# EAGLE board board layout (EAGLE 9.6.2), part 1 of 2
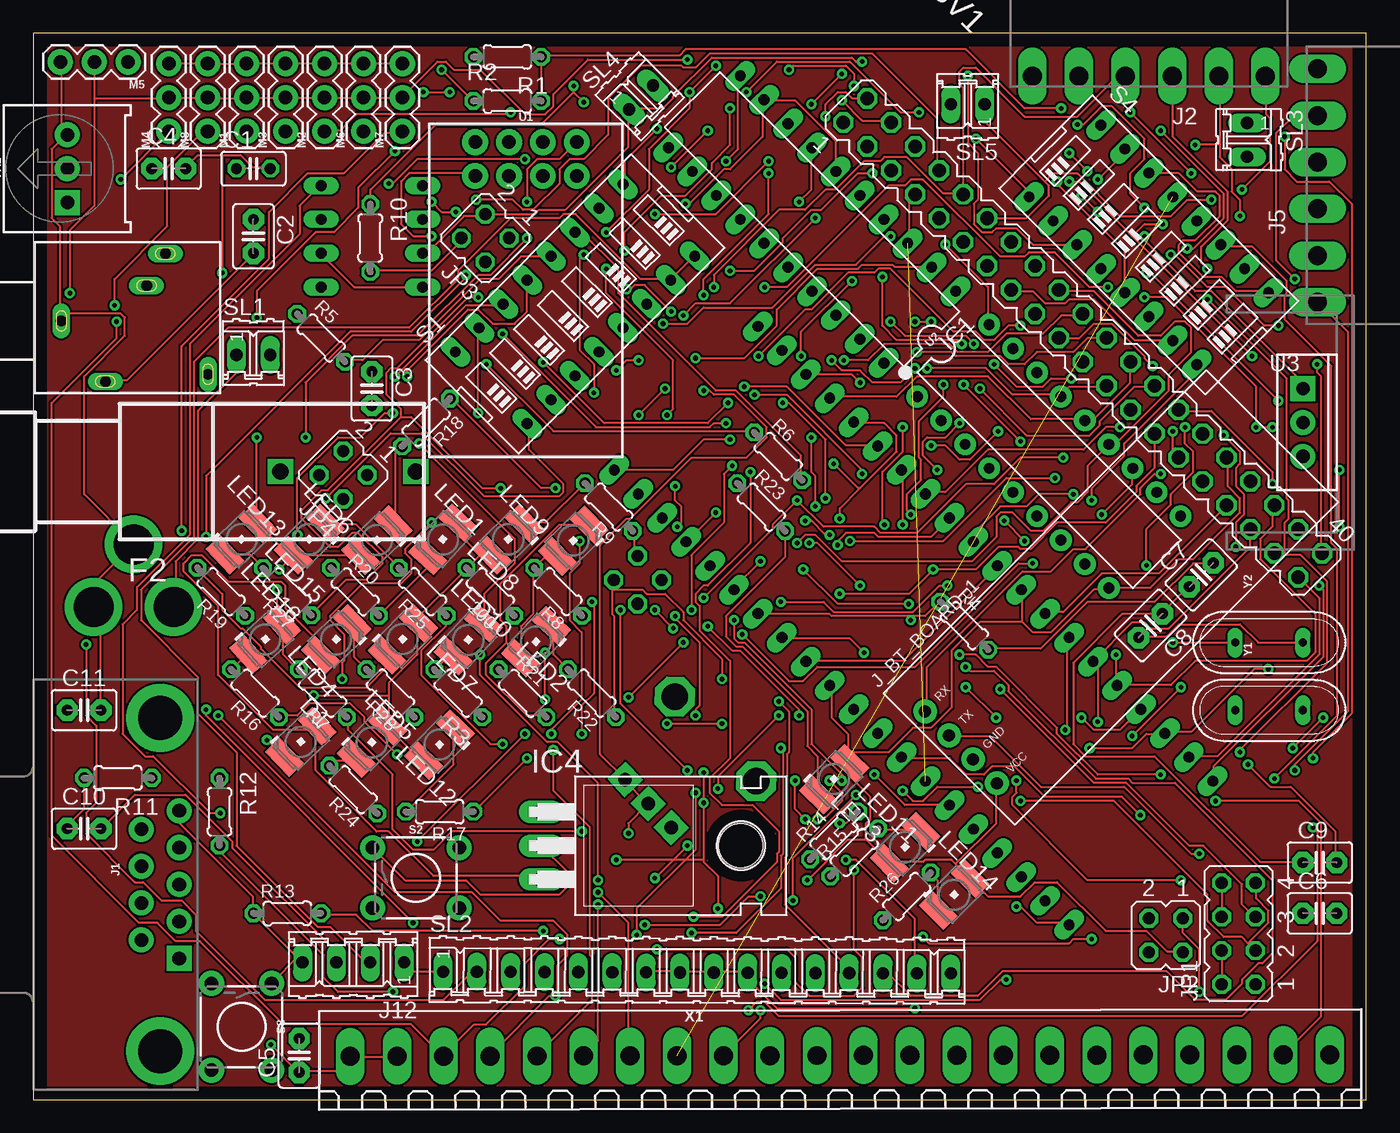
[diagram p0: board, top side]
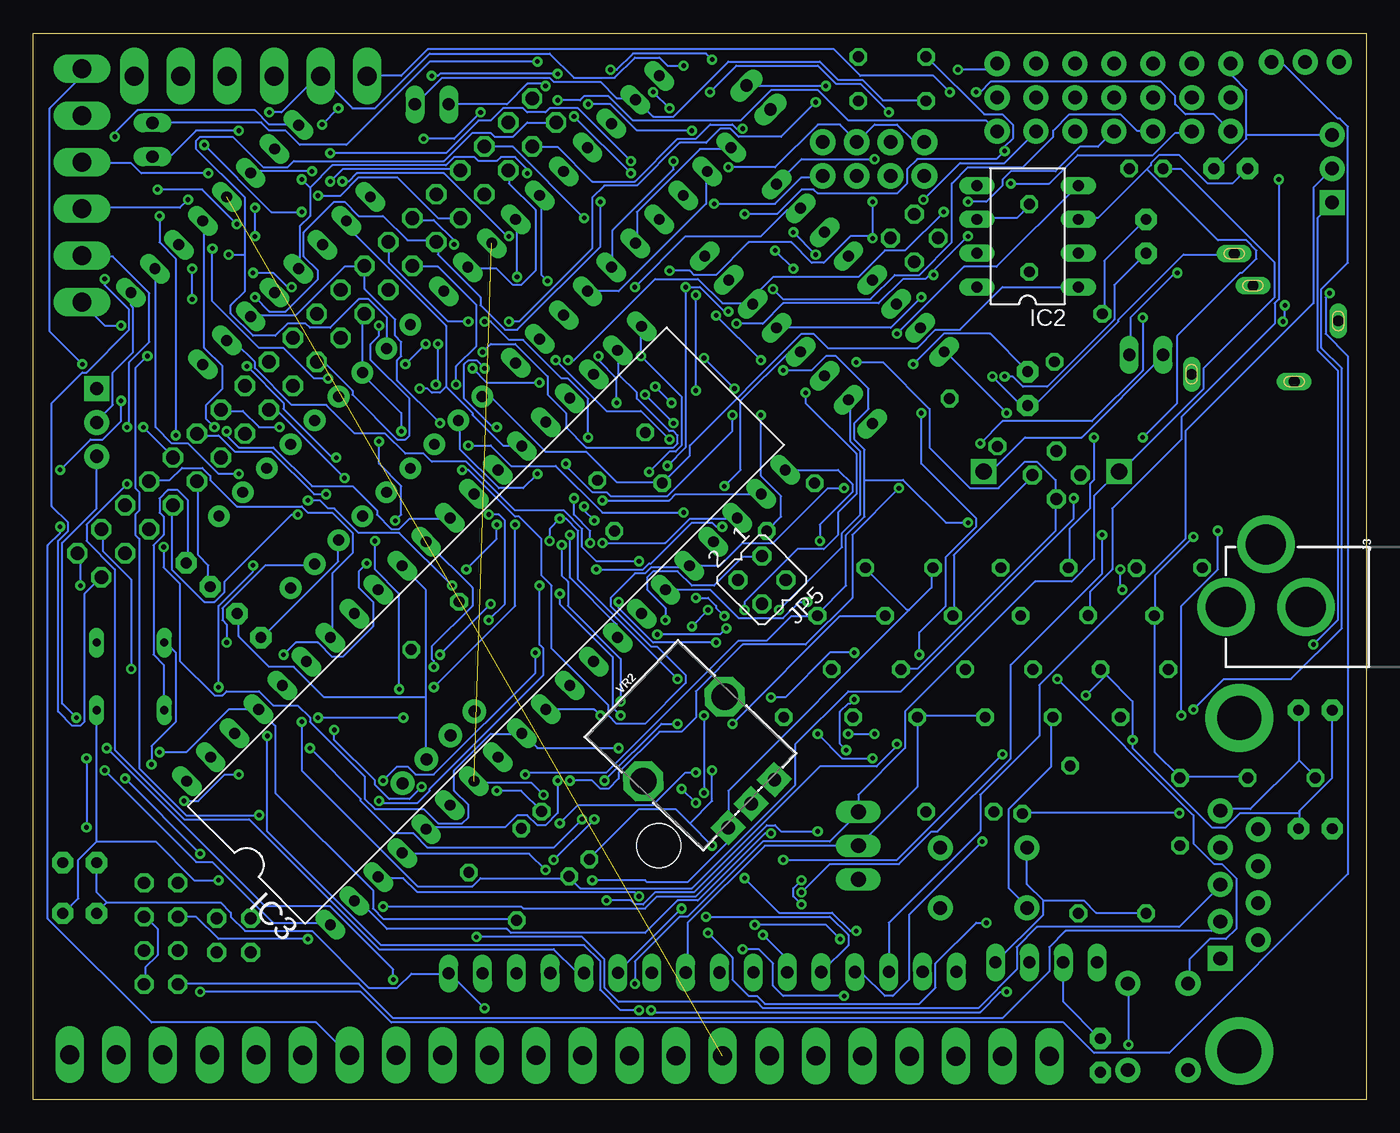
[diagram p1: board, bottom side, seen from below]

Size 100 x 80 mm. Coordinates in mm from the lower left corner, seen from the top.
Outline: 0,0 100,0 100,80 0,80 0,0
Copper layers (1*16): Top 0.035mm / dielectric 1.5mm / Bottom 0.035mm
Design rules "default": minimum track width 6mil, minimum drill 0.35mm, track to track 6mil, track to pad 6mil, pad to pad 6mil, via to via 6mil, smd to smd 6mil, copper to edge 40mil, drill to drill 6mil, minimum pad ring 10mil, minimum via ring 8mil, stop-mask expansion 4mil, vias tented up to drill 0mil, thermal gap 10mil

## Footprints (pad centres in the part's own frame; a part is rotated, then mirrored left to right if it is on the bottom)
0204/5 = drill 0.813 octagon: 1 -2.54,0; 2 2.54,0
C025-025X050 = drill 0.813 octagon: 1 -1.27,0; 2 1.27,0
C2.5-3 = drill 0.813 pad 1.6 octagon: 1 -1.27,0; 2 1.27,0
PLCC2 = smd 2.6 x 1.5: A 0,1.7; C 0,-1.7
FUSE_HOLDER_MENTOR-1821 = drill 1.219 pad 1.905 square: A 10.16,0; B 0,0
DIL20 = drill 0.813 long: 1 -11.43,-3.81; 2 -8.89,-3.81; 3 -6.35,-3.81; 4 -3.81,-3.81; 5 -1.27,-3.81; 6 1.27,-3.81; 7 3.81,-3.81; 8 6.35,-3.81; 9 8.89,-3.81; 10 11.43,-3.81; 11 11.43,3.81; 12 8.89,3.81; 13 6.35,3.81; 14 3.81,3.81; 15 1.27,3.81; 16 -1.27,3.81; 17 -3.81,3.81; 18 -6.35,3.81; 19 -8.89,3.81; 20 -11.43,3.81
DIL08 = drill 0.813 long: 1 -3.81,-3.81; 2 -1.27,-3.81; 3 1.27,-3.81; 4 3.81,-3.81; 5 3.81,3.81; 6 1.27,3.81; 7 -1.27,3.81; 8 -3.81,3.81
DIL40 = drill 0.813 long: 1 -24.13,-7.62; 2 -21.59,-7.62; 3 -19.05,-7.62; 4 -16.51,-7.62; 5 -13.97,-7.62; 6 -11.43,-7.62; 7 -8.89,-7.62; 8 -6.35,-7.62; 9 -3.81,-7.62; 10 -1.27,-7.62; 11 1.27,-7.62; 12 3.81,-7.62; 13 6.35,-7.62; 14 8.89,-7.62; 15 11.43,-7.62; 16 13.97,-7.62; 17 16.51,-7.62; 18 19.05,-7.62; 19 21.59,-7.62; 20 24.13,-7.62; 21 24.13,7.62; 22 21.59,7.62; 23 19.05,7.62; 24 16.51,7.62; 25 13.97,7.62; 26 11.43,7.62; 27 8.89,7.62; 28 6.35,7.62; 29 3.81,7.62; 30 1.27,7.62; 31 -1.27,7.62; 32 -3.81,7.62; 33 -6.35,7.62; 34 -8.89,7.62; 35 -11.43,7.62; 36 -13.97,7.62; 37 -16.51,7.62; 38 -19.05,7.62; 39 -21.59,7.62; 40 -24.13,7.62
TO220H = drill 1.118 long: 1 -2.54,-10.16; 2 0,-10.16; 3 2.54,-10.16 | hole 3.302: 0,4.826
DB9 = drill 1.016 pad 1.88 square: 1 -5.54,-1.42 | drill 1.016 pad 1.88: 2 -2.77,-1.42; 3 0,-1.42; 4 2.77,-1.42; 5 5.54,-1.42; 6 -4.15,1.42; 7 -1.38,1.42; 8 1.38,1.42; 9 4.15,1.42 | drill 3.302 pad 5.08: G1 -12.5,0; G2 12.5,0
1X06_SCREW_TERMINAL_BLOCK = drill 1.422 long: 1 -8.75,5.25; 2 -5.25,5.25; 3 -1.75,5.25; 4 1.75,5.25; 5 5.25,5.25; 6 8.75,5.25
POWER_JACK_PTH = drill 2.997 pad 4.318: GND 0,7.7; GNDBREAK 4.7,10.7; PWR 0,13.7
04P = drill 0.914 long: 1 -3.81,0; 2 -1.27,0; 3 1.27,0; 4 3.81,0
BT_BOARD_FOOTPRINT = drill 0.9 pad 1.778: GND -16.51,-1.27; RX -16.51,3.81; TX -16.51,1.27; VCC -16.51,-3.81
JP4Q = drill 0.914 octagon: 1 -3.81,-1.27; 2 -3.81,1.27; 3 -1.27,-1.27; 4 -1.27,1.27; 5 1.27,-1.27; 6 1.27,1.27; 7 3.81,-1.27; 8 3.81,1.27
JP2Q = drill 0.914 octagon: 1 -1.27,-1.27; 2 -1.27,1.27; 3 1.27,-1.27; 4 1.27,1.27
1X03 = drill 1.016 pad 1.88: 1 0,0; 2 2.54,0; 3 5.08,0
EDG-08 = drill 0.813 long: 1 -8.89,-3.81; 2 -6.35,-3.81; 3 -3.81,-3.81; 4 -1.27,-3.81; 5 1.27,-3.81; 6 3.81,-3.81; 7 6.35,-3.81; 8 8.89,-3.81; 9 8.89,3.81; 10 6.35,3.81; 11 3.81,3.81; 12 1.27,3.81; 13 -1.27,3.81; 14 -3.81,3.81; 15 -6.35,3.81; 16 -8.89,3.81
TACTILE_SWITCH_PTH_6.0MM = drill 1.016 pad 1.88: 1 -3.251,2.261; 2 3.251,2.261; 3 -3.251,-2.261; 4 3.251,-2.261
02P = drill 0.914 long: 1 -1.27,0; 2 1.27,0
16P = drill 0.914 long: 1 -19.05,0; 2 -16.51,0; 3 -13.97,0; 4 -11.43,0; 5 -8.89,0; 6 -6.35,0; 7 -3.81,0; 8 -1.27,0; 9 1.27,0; 10 3.81,0; 11 6.35,0; 12 8.89,0; 13 11.43,0; 14 13.97,0; 15 16.51,0; 16 19.05,0
MA20-2 = drill 1.016 octagon: 1 -24.13,-1.27; 2 -24.13,1.27; 3 -21.59,-1.27; 4 -21.59,1.27; 5 -19.05,-1.27; 6 -19.05,1.27; 7 -16.51,-1.27; 8 -16.51,1.27; 9 -13.97,-1.27; 10 -13.97,1.27; 11 -11.43,-1.27; 12 -11.43,1.27; 13 -8.89,-1.27; 14 -8.89,1.27; 15 -6.35,-1.27; 16 -6.35,1.27; 17 -3.81,-1.27; 18 -3.81,1.27; 19 -1.27,-1.27; 20 -1.27,1.27; 21 1.27,-1.27; 22 1.27,1.27; 23 3.81,-1.27; 24 3.81,1.27; 25 6.35,-1.27; 26 6.35,1.27; 27 8.89,-1.27; 28 8.89,1.27; 29 11.43,-1.27; 30 11.43,1.27; 31 13.97,-1.27; 32 13.97,1.27; 33 16.51,-1.27; 34 16.51,1.27; 35 19.05,-1.27; 36 19.05,1.27; 37 21.59,-1.27; 38 21.59,1.27; 39 24.13,-1.27; 40 24.13,1.27
ESP8266_ESP-01 = drill 1.016 pad 1.93: 1 -3.81,-11.13; 2 -1.27,-11.13; 3 1.27,-11.13; 4 3.81,-11.13; 5 3.81,-8.59; 6 1.27,-8.59; 7 -1.27,-8.59; 8 -3.81,-8.59
DIP18 = drill 0.813 pad 1.626: 1 -10.16,-3.81; 2 -7.62,-3.81; 3 -5.08,-3.81; 4 -2.54,-3.81; 5 0,-3.81; 6 2.54,-3.81; 7 5.08,-3.81; 8 7.62,-3.81; 9 10.16,-3.81; 10 10.16,3.81; 11 7.62,3.81; 12 5.08,3.81; 13 2.54,3.81; 14 0,3.81; 15 -2.54,3.81; 16 -5.08,3.81; 17 -7.62,3.81; 18 -10.16,3.81
TO220-ADJ = drill 1 pad 1.88 square: ADJ -2.54,0 | drill 1 pad 1.88: IN 2.54,0; OUT 0,0
TRIMPOT-PTH-3386U = drill 1.016 pad 1.88 square: 1 -2.54,-0.015 | drill 1.016 pad 1.88: 2 0,-0.015; 3 2.54,-0.015
POT-PTH-ALPS = drill 1 pad 1.88 square: P$1 7,-2.5; P$2 7,0; P$3 7,2.5 | drill 2 octagon: P$4 0,-4.4; P$5 0,4.4
180G-22 = drill 1.422 long: 1 -36.75,0; 2 -33.25,0; 3 -29.75,0; 4 -26.25,0; 5 -22.75,0; 6 -19.25,0; 7 -15.75,0; 8 -12.25,0; 9 -8.75,0; 10 -5.25,0; 11 -1.75,0; 12 1.75,0; 13 5.25,0; 14 8.75,0; 15 12.25,0; 16 15.75,0; 17 19.25,0; 18 22.75,0; 19 26.25,0; 20 29.75,0; 21 33.25,0; 22 36.75,0
1503_09 = drill 0.8 pad 1.2 long: 1 0,-2.1; 2 -4.55,-5.4; 3 5.05,-9.9; 4 -4,-13.1; 5 2.65,-8.5
QS = drill 0.61 long: 1 -2.54,0; 2 2.54,0

## Placement (x,y rotation side)
200  [0204/5]  34.29,38.1 135 top
C1  47uF  [C025-025X050]  16.51,69.85 0 top
C2  10uF  [C2.5-3]  16.51,64.77 270 top
C3  10uF  [C2.5-3]  25.4,53.34 270 top
C4  1uF  [C2.5-3]  10.16,69.85 0 top
C5  1uF  [C2.5-3]  19.94,3.3 90 top
C6  15uF  [C2.5-3]  96.52,13.97 0 top
C7  15uF  [C2.5-3]  87.63,39.37 45 top
C8  15uF  [C2.5-3]  83.82,35.56 225 top
C9  15uF  [C2.5-3]  96.52,17.78 0 top
C10  1uF  [C2.5-3]  3.81,20.32 0 top
C11  1uF  [C2.5-3]  3.81,29.21 0 top
D1  LG_T679-E1F1-1  [PLCC2]  20.07,26.84 313.5 top
F2  FUSE1821  [FUSE_HOLDER_MENTOR-1821]  18.54,47.12 0 top
IC1  MAX233  [DIL20]  58.42,66.04 135 top
IC2  PCA82C250  [DIL08]  25.4,64.77 90 bottom
IC3  PIC16F877P  [DIL40]  66.04,35.56 45 bottom
IC4  7805T  [TO220H]  48.26,19.05 270 top
J1  [DB9]  9.53,16.13 90 top
J2  [1X06_SCREW_TERMINAL_BLOCK]  83.69,82.04 180 top
J3  POWER_JACK  [POWER_JACK_PTH]  -3.17,36.96 90 bottom
J5  [1X06_SCREW_TERMINAL_BLOCK]  101.6,68.58 90 top
J12  [04P]  24,10.29 180 top
J_BT_BOARD_1  BLUETOOTH_BOARD  [BT_BOARD_FOOTPRINT]  81.28,38.1 45 top
JP1  [JP4Q]  90.42,12.45 90 top
JP2  [JP2Q]  84.96,12.32 180 top
JP3  [JP2Q]  33.91,64.64 135 top
JP4  [JP2Q]  23.24,46.86 135 top
JP5  [JP2Q]  45.34,38.99 225 bottom
LED1  LG_T679-E1F1-1  [PLCC2]  35.64,42.04 134.6 top
LED2  LG_T679-E1F1-1  [PLCC2]  32.64,34.49 317.1 top
LED3  LG_T679-E1F1-1  [PLCC2]  65.41,18.94 134.9 top
LED4  LG_T679-E1F1-1  [PLCC2]  17.4,34.53 311.8 top
LED5  LG_T679-E1F1-1  [PLCC2]  30.48,26.63 135.4 top
LED6  LG_T679-E1F1-1  [PLCC2]  25.78,41.97 133.3 top
LED7  LG_T679-E1F1-1  [PLCC2]  27.71,34.54 315.5 top
LED8  LG_T679-E1F1-1  [PLCC2]  30.73,42.03 317.7 top
LED9  LG_T679-E1F1-1  [PLCC2]  40.51,41.94 134.4 top
LED10  LG_T679-E1F1-1  [PLCC2]  37.72,34.36 136.5 top
LED11  LG_T679-E1F1-1  [PLCC2]  60.07,24.04 315.5 top
LED12  LG_T679-E1F1-1  [PLCC2]  25.4,26.81 315.9 top
LED13  LG_T679-E1F1-1  [PLCC2]  15.62,42.04 313.3 top
LED14  LG_T679-E1F1-1  [PLCC2]  69.09,15.37 315 top
LED15  LG_T679-E1F1-1  [PLCC2]  20.7,42.04 134.9 top
LED16  LG_T679-E1F1-1  [PLCC2]  22.73,34.52 134.6 top
M1  SERVO  [1X03]  16,72.64 90 top
M2  SERVO  [1X03]  21.84,72.64 90 top
M3  SERVO  [1X03]  18.92,72.64 90 top
M4  SERVO  [1X03]  10.16,72.64 90 top
M5  SERVO  [1X03]  7.11,77.85 180 top
M6  SERVO  [1X03]  24.77,72.64 90 top
M7  SERVO  [1X03]  27.69,72.64 90 top
M8  SERVO  [1X03]  13.08,72.64 90 top
R1  220  [0204/5]  35.56,78.23 180 top
R2  360  [0204/5]  35.56,74.93 0 top
R3  470  [0204/5]  31.88,30.48 135 top
R4  330  [0204/5]  69.85,35.56 315 top
R5  1k  [0204/5]  21.59,57.15 315 top
R6  1k  [0204/5]  55.88,48.26 315 top
R7  47k  [0204/5]  21.72,30.48 135 top
R8  4.7k  [0204/5]  39.37,38.1 135 top
R9  470  [0204/5]  43.18,44.45 135 top
R10  [0204/5]  25.27,64.64 270 top
R11  2000  [0204/5]  6.35,24.13 180 top
R12  1000  [0204/5]  13.97,21.59 270 top
R13  2000  [0204/5]  19.05,13.97 0 top
R14  1000  [0204/5]  60.07,19.81 45 top
R15  1000  [0204/5]  61.59,18.54 45 top
R16  1000  [0204/5]  16.64,30.48 135 top
R17  1000  [0204/5]  30.48,21.59 180 top
R18  1000  [0204/5]  29.46,50.8 225 top
R19  1000  [0204/5]  14.1,38.1 135 top
R20  1000  [0204/5]  24.13,38.1 315 top
R21  470  [0204/5]  36.7,30.48 315 top
R22  470  [0204/5]  41.91,30.48 135 top
R23  470  [0204/5]  54.61,44.45 315 top
R24  470  [0204/5]  24,23.24 135 top
R25  470  [0204/5]  29.21,38.1 135 top
R26  470  [0204/5]  65.53,15.24 45 top
R27  470  [0204/5]  19.05,38.1 135.6 top
R28  470  [0204/5]  26.8,30.48 135 top
S1  [EDG-08]  40.64,59.69 45 top
S2  MOMENTARY-SWITCH-SPST-PTH-6.0MM  [TACTILE_SWITCH_PTH_6.0MM]  28.7,16.64 0 top
S3  MOMENTARY-SWITCH-SPST-PTH-6.0MM  [TACTILE_SWITCH_PTH_6.0MM]  15.62,5.46 270 top
S4  [EDG-08]  83.69,64.14 315 top
SL1  [02P]  16.51,55.88 0 top
SL2  [16P]  49.78,9.53 359.8 top
SL3  [02P]  91.06,72.01 270 top
SL4  [02P]  45.59,75.18 45 top
SL5  [02P]  70.1,74.68 180 top
SV1  [MA20-2]  78.74,57.15 315 top
U1  ESP8266_ESP-01  [ESP8266_ESP-01]  36.96,60.71 180 top
U2  MCP2515  [DIP18]  76.2,48.26 315 top
U3  V_REG_317SINK  [TO220-ADJ]  95.25,50.8 270 top
VR1  10k  [TRIMPOT-PTH-3386U]  2.54,69.85 90 top
VR2  10k  [POT-PTH-ALPS]  51.18,27.05 316.2 bottom
X1  [180G-22]  60.53,3.3 0.1 top
X2  1503_09  [1503_09]  0,58.42 90 top
Y1  20M  [QS]  92.71,29.21 0 top
Y2  16M  [QS]  92.71,34.29 0 top

## Library data of the parts
200 R1-R28 = rcl; SPICEPREFIX: R
C1 = rcl; SPICEPREFIX: C
C2-C11 = capacitor-wima
D1 LED1-LED16 = led; COLOR: green
F2 = fuse; OC_FARNELL: unknown; OC_NEWARK: unknown
IC1 = maxim; MPN: MAX233ACPP+G36; OC_FARNELL: 1593332; OC_NEWARK: 89K3459
IC2 = micro-philips; OC_FARNELL: 3692358; OC_NEWARK: unknown
IC3 = microchip; MF: MICROCHIP; MPN: PIC16F877-04/P; OC_FARNELL: 9761349; OC_NEWARK: 61K3463
IC4 = linear
J1 = SparkFun-Connectors; PROD_ID: CONN-08194
J2 J5 = SparkFun-Connectors
J3 = SparkFun-Connectors; PROD_ID: CONN-08197
J12 SL1-SL5 = con-amp-quick; OC_FARNELL: unknown; OC_NEWARK: unknown
J_BT_BOARD_1 = bluetooth
JP1-JP5 = jumper
M1-M8 = SparkFun-Electromechanical
S1 S4 Y1 Y2 = special
S2 S3 = SparkFun-Switches; PROD_ID: SWCH-08441; SF_SKU: COM-00097
SV1 = con-lstb; OC_FARNELL: unknown; OC_NEWARK: unknown
U1 = SparkFun-RF; SF_ID: WRL-13678
U2 = SparkFun-IC-Comms; PROD_ID: NA-XXXXX
U3 = SparkFun-IC-Power
VR1 = SparkFun-Resistors; PROD_ID: RES-09730; SF_SKU: COM-09806
VR2 = SparkFun-Resistors; PROD_ID: RES-09177; SF_SKU: COM-09288
X1 = con-weidmueller-sl35; OC_FARNELL: unknown; OC_NEWARK: unknown
X2 = con-lumberg; OC_FARNELL: 1243244; OC_NEWARK: unknown

## Nets
3.3V: LED2.A R1.2 S4.9 S4.14 U3.OUT
A0: IC3.2 SV1.2 VR2.P$2 VR2.P$3
A1: IC3.3 M8.1 S1.9 SV1.3 X1.3
A2: IC3.4 M7.1 SV1.4 X1.4
A3: IC1.2 IC3.5 JP5.1 R9.1 SV1.5
A4: IC3.6 R8.1 S3.3 SV1.6
A5: IC1.3 IC3.7 JP4.1 R25.1 SV1.7
B0: IC3.33 SV1.33 U2.12
B1: IC3.34 R14.2 R16.1 SV1.34
B2: IC3.35 R15.1 S1.1 SV1.35
B3: IC3.36 J2.5 J5.4 M2.1 SV1.36
B4: IC3.37 J2.3 M3.1 R26.1 S1.6 SV1.37
B5: IC3.38 J2.6 M4.1 R27.1 S1.5 SV1.38
B6: IC3.39 J5.5 SV1.39
B7: IC3.40 J5.6 SV1.40
BO3.3V: S4.8 X1.5
C0: IC3.15 R17.1 S4.7 SV1.15
C1: IC3.16 R18.1 S4.6 SV1.16
C2: IC3.17 SV1.17 U2.16
C3: IC3.18 SV1.18 U2.13
C4: IC3.23 SV1.23 U2.15
C5: IC3.24 SV1.24 U2.14
C6: IC3.25 JP5.2 R22.1 S4.1 SV1.25
C7: IC3.26 JP4.2 R21.1 S4.2 SV1.26
D0: IC3.19 SL2.6 SV1.19
D1: IC3.20 SL2.4 SV1.20
D2: IC3.21 SL2.5 SV1.21
D3: IC3.22 SV1.22
D4: IC3.27 SL2.11 SV1.27
D5: IC3.28 SL2.12 SV1.28
D6: IC3.29 SL2.13 SV1.29
D7: IC3.30 SL2.14 SV1.30
E0: IC3.8 J2.1 M6.1 SV1.8
E1: IC3.9 J2.2 M5.1 SV1.9
E2: IC3.10 J2.4 M1.1 SV1.10
GND: C1.2 C4.2 C5.1 C6.1 C7.1 C8.1 C9.1 C10.1 C11.2 IC1.6 IC1.9 IC3.12 IC3.31 IC4.2 J1.5 J3.GND J3.GNDBREAK J5.3 J12.1 J12.4 J_BT_BOARD_1.GND M1.3 M2.3 M3.3 M4.3 M5.3 M6.3 M7.3 M8.3 R2.1 R3.1 R11.2 R13.1 R28.1 S2.1 S3.1 SL1.2 SL2.1 SL2.7 SL2.8 SL2.9 SL2.10 SL2.16 SL5.1 SV1.12 SV1.31 U1.8 U2.18 VR1.3 X1.1 X1.2 X2.1
LRXC: IC2.4 R24.1 U2.2
LTXC: IC2.1 R23.1 U2.1
ML: C2.2 S1.14 X2.2
MR: C3.2 S1.13 X2.3
MWRX: R11.1 R12.1 R19.1 S4.5 U1.5
N$1: LED1.C R9.2
N$2: S1.3
N$5: JP3.4 R10.2
N$6: IC1.10 IC1.16
N$7: C1.1 F2.B IC4.1 U3.IN
N$9: F2.A J3.PWR SL1.1
N$10: R1.1 R2.2 U3.ADJ
N$12: LED2.C R3.2
N$14: IC1.5 JP1.3 JP1.7
N$15: IC1.4 JP1.1 JP1.5
N$16: J1.3 JP1.6 JP1.8
N$18: J1.2 JP1.2 JP1.4
N$21: C2.1 R5.1
N$22: IC1.12 IC1.17
N$23: IC1.11 IC1.15
N$24: C3.1 R6.1
N$27: 200.1 SL2.15
N$28: C7.2 R4.2 Y1.1
N$29: SL2.3 VR1.2
N$30: SL2.2 VR1.1
N$32: JP2.1 M1.2 M2.2 M3.2 M4.2 M5.2 M6.2 M7.2 M8.2 SL5.2
N$39: J12.2 S1.7 S1.8
N$42: IC2.2 IC2.8
N$44: IC2.6 R10.1 SL3.2 SL4.2
N$45: IC2.7 JP3.3 SL3.1 SL4.1
N$47: LED3.C R15.2
N$50: LED4.C R16.2
N$52: LED5.C R17.2
N$53: LED6.C R18.2
N$55: LED7.C R19.2
N$57: LED8.C R20.2
N$59: LED9.C R21.2
N$61: LED10.C R22.2
N$63: LED11.C R23.2
N$65: LED12.C R24.2
N$67: LED15.C R25.2
N$69: LED14.C R26.2
N$71: LED13.C R27.2
N$73: LED16.C R28.2
OSC1: C6.2 IC3.13 SV1.14 Y1.2
OSC2: IC3.14 R4.1 SV1.13
OSC3: C8.2 U2.7 Y2.2
OSC4: C9.2 U2.8 Y2.1
P0: S1.4 X1.21
P1: S1.10 X1.16
P2: X1.10
P3: X1.22
P4: X1.20
P5: X1.19
P6: X1.18
P7: X1.17
P8: X1.15
P9: X1.14
P10: X1.13
P11: X1.12
P12: X1.11
P13: S4.12 X1.9
P14: S4.13 X1.8
P15: S1.16 X1.7
P16: S1.15 X1.6
PBRX: J_BT_BOARD_1.RX S4.10
PBTX: J_BT_BOARD_1.TX S4.11
PL: R5.2 S1.12
PLED: D1.A IC4.3 LED16.A
PMRX: R13.2 R14.1 S1.2
PR: R6.2 S1.11
PWRX: R12.2 S4.16
PWTX: R20.1 S4.4 S4.15 U1.1
RESET: IC3.1 J5.1 R7.1 S2.3 SV1.1 U2.17
VCCA: 200.2 C4.1 C5.2 C10.2 C11.1 D1.C IC1.7 IC2.3 IC3.11 IC3.32 J5.2 J12.3 J_BT_BOARD_1.VCC JP2.2 LED1.A LED3.A LED4.A LED5.A LED6.A LED7.A LED8.A LED9.A LED10.A LED11.A LED12.A LED13.A LED14.A LED15.A R7.2 R8.2 SV1.11 SV1.32 U2.9 VR2.P$1
W3.3V: S4.3 U1.2 U1.4